# Altium PCB edge_bridge.PcbDoc
Units mil, origin at the board's own origin, x right, y up, seen from the top; angles counter-clockwise.
Board outline 157.48 x 1259.84 mil, 2 copper layers (Top Layer, Bottom Layer); 1 components, 0 nets, 13 pads, 0 vias.
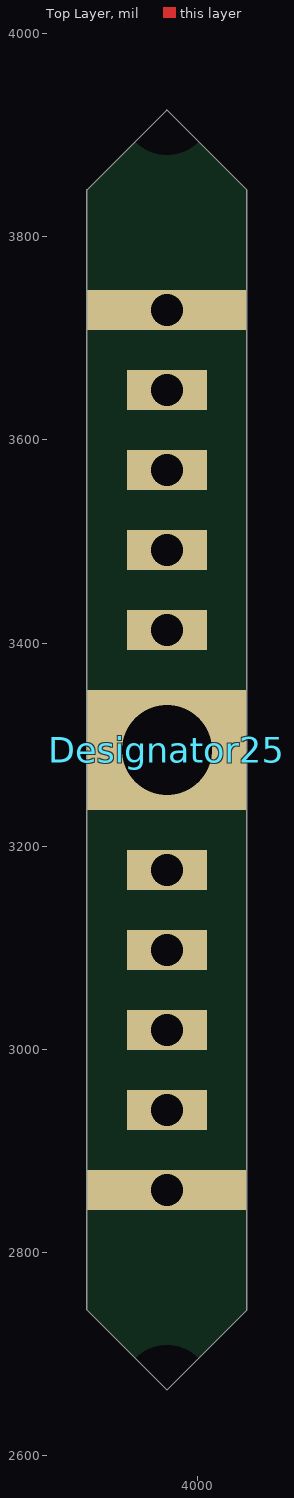
[diagram p0: Top Layer view]
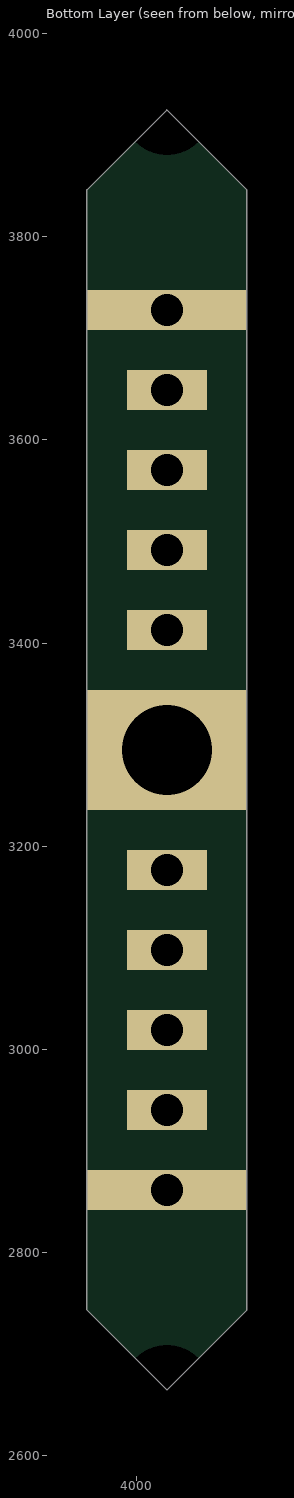
[diagram p1: Bottom Layer view, seen from below]

## Layer stack, top to bottom
Top Solder: solder mask 0.4, Solder Resist, Dk 3.5
Top Layer: signal copper 1.4
Dielectric 1: dielectric 12.6, FR-4, Dk 4.8
Bottom Layer: signal copper 1.4
Bottom Solder: solder mask 0.4, Solder Resist, Dk 3.5

## Board outline
3970,3924.84 3891.26,3846.1 3891.26,2743.74 3970,2665 4048.74,2743.74 4048.74,3846.1

## Design rules (kind name [scope] priority, off if disabled: settings)
Clearance [All] p1: gap=10
PolygonConnect [All] p1: connectstyle=Relief reliefconductorwidth=10 reliefentries=4 polygonreliefangle="90 Angle" airgapwidth=10
RoutingVias [All] p1: holewidth=28 width=50 viastyle="Through Hole" minholewidth=28 minwidth=50 maxholewidth=28 maxwidth=50
SolderMaskExpansion [All] p1: expansion=4
UnpouredPolygon [All] p1: allowunpoured=FALSE
Width [All] p1: maxlimit=10 minlimit=10 preferedwidth=10
29 further rules are at their usual default settings.

## Components (designator, comment, footprint, x,y, rotation, side; value= is the part's Value field where it differs from the comment)
Designator25 "Comment" "MODULAR8 EDGE BRIDGE" 3970,2665 r0 top

## Footprints (in the part's own frame and the unit in brackets; to place one, negate y for a bottom-side part, rotate by r counter-clockwise, add the part's x,y. Pads: shape width x height; smd on the part's side, far side on the other; paste and mask are expansions set on the pad)
"MODULAR8 EDGE BRIDGE" [mm]
  rect 0x0 hole 2.25 unplated copper offset 0.5,0: 999(0,0) 999(0,32)
  rect 2x1 hole 0.8: A_0(0,25) A_1(0,23) A_2(0,21) A_3(0,19) A_4(0,13) A_5(0,11) A_6(0,9) A_7(0,7)
  rect 4x3 hole 2.25: A_GND(0,16)
  rect 4x1 hole 0.8: A_V1(0,27) A_V2(0,5)
  body extent -2.13,-0.13 2.08,32.13

## Nets (pads, with @x,y where several pads share a name; then routed paths per layer and width w, separated by ;. In a path a pad name is that pad's centre, name@x,y a point inside that pad or via, vN(x,y) a via of type N, cw(c..) or ccw(c..) an arc to the next point about the centre after c; other vN are vias at no path point)
pads on no net: Designator25.999 Designator25.A_0 Designator25.A_1 Designator25.A_2 Designator25.A_3 Designator25.A_4 Designator25.A_5 Designator25.A_6 Designator25.A_7 Designator25.A_GND Designator25.A_V1 Designator25.A_V2